# Altium PCB OK6010_DB.PcbDoc (part 2 of 4)
Units mil, origin at the board's own origin, x right, y up, seen from the top; angles counter-clockwise.
Board outline 4000 x 5500 mil, 4 copper layers (Top Layer, Ground Plane, Power Plane, Bottom Layer), stack 34.2 mil thick; 268 components, 248 nets, 1028 pads, 599 vias.
Unrouted connection lines stored in the file: 10.
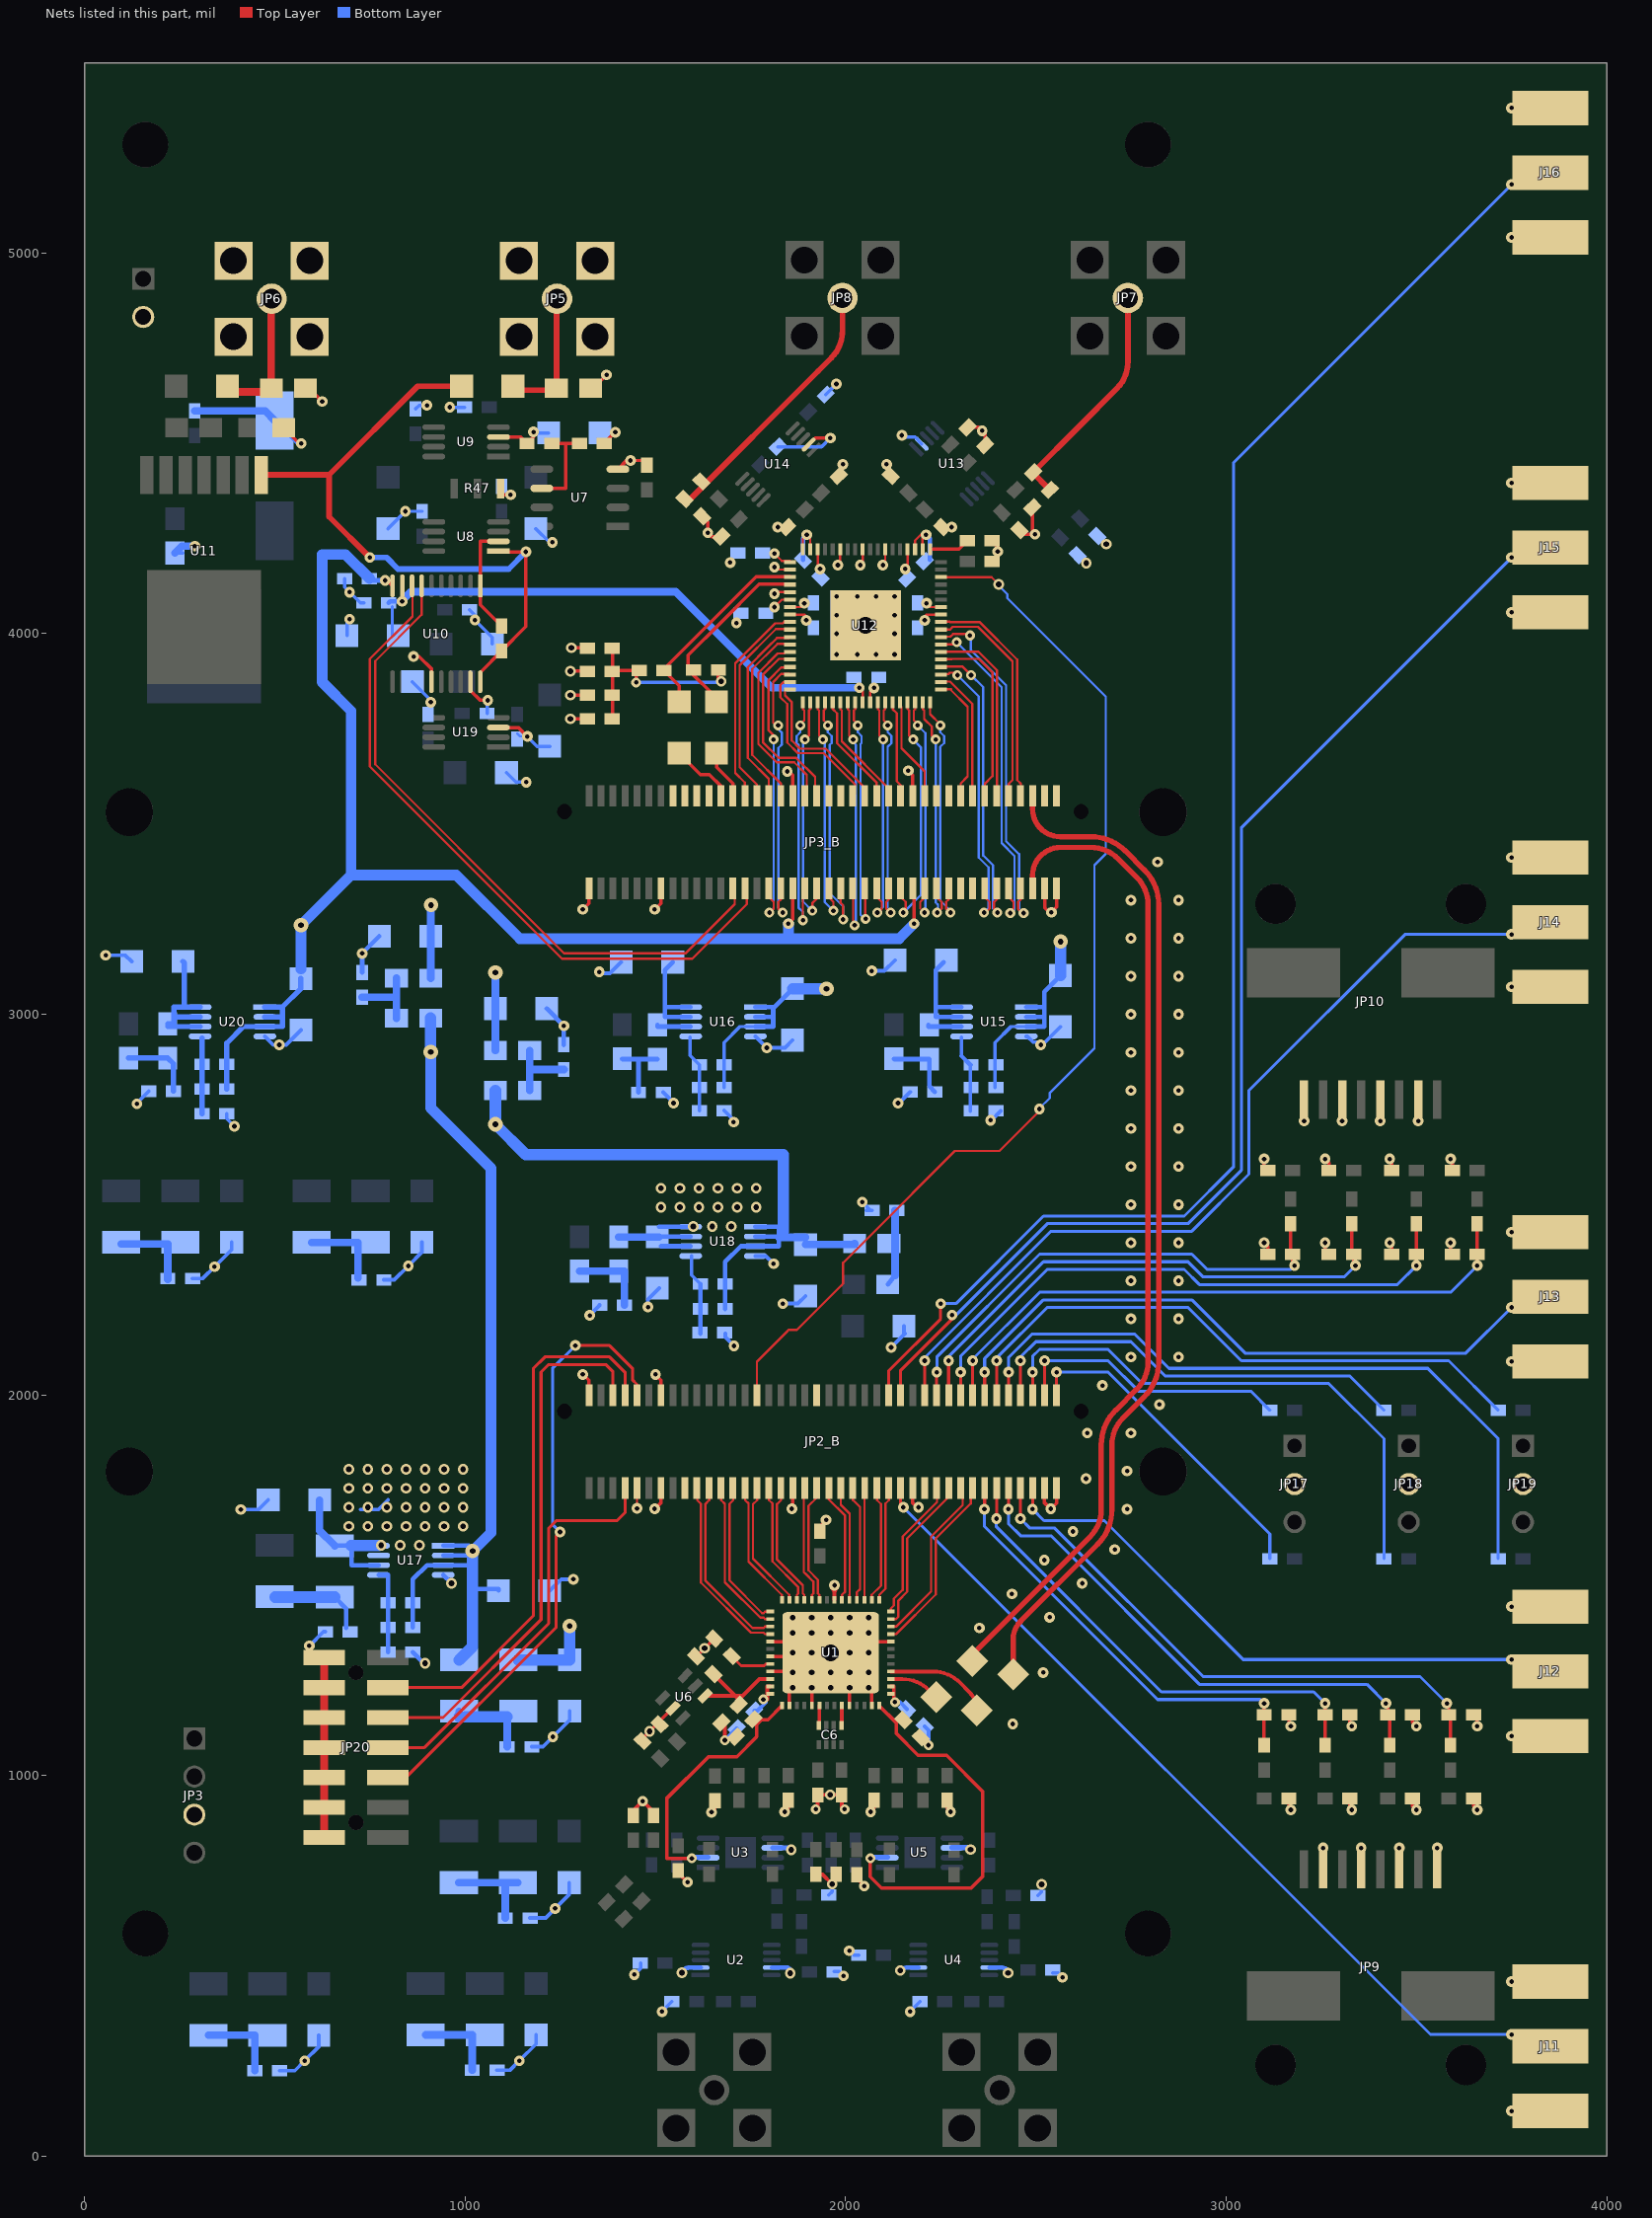
[diagram p4: the nets of this part, all layers, seen from the top]

## Via types
v1: diameter 28, hole 12, Top Layer to Bottom Layer, 291 vias
v2: diameter 28, hole 15, Top Layer to Bottom Layer, 214 vias
v3: diameter 26, hole 12, Top Layer to Bottom Layer, 64 vias
v4: diameter 38, hole 15, Top Layer to Bottom Layer, 26 vias
v5: diameter 35, hole 15, Top Layer to Bottom Layer, 2 vias
v6: diameter 26, hole 12, Top Layer to Bottom Layer, tented both sides, 1 vias
v7: diameter 58, hole 44, Top Layer to Bottom Layer, 1 vias

## Nets (pads, with @x,y where several pads share a name; then routed paths per layer and width w, separated by ;. In a path a pad name is that pad's centre, name@x,y a point inside that pad or via, vN(x,y) a via of type N, cw(c..) or ccw(c..) an arc to the next point about the centre after c; other vN are vias at no path point) (continued)
AGND: C1.1 C2.2 C3.2 C4.2 C8.2 C9.1 C10.2 C11.2 C12.2 C13.2 C14.2 C15.2 C16.1 C17.1 C18.1 C19.2 C20.2 C21.2 C22.2 C23.2 C24.1 C26.2 C27.2 C28.2 C29.1 C30.1 C31.2 C32.1 C33.2 C34.2 C35.2 C36.2 C39.2 C40.2 C41.1 C42.1 C43.2 C44.1 C45.1 C46.2 C47.2 C48.2 C49.2 C50.1 C51.2 C52.2 C53.2 C55.2 C56.2 C57.2 C58.2 C59.2 C60.2 C61.2 C63.1 C64.2 C65.2 C66.2 C68.2 C69.2 C70.2 C71.2 C73.2 C74.2 C75.2 C76.1 C77.2 C78.2 C79.1 C80.1 C81.2 C82.2 C83.2 C84.2 C85.2 C86.2 C87.2 C88.2 C89.2 C90.2 C91.2 C92.2 C93.2 C94.1 C95.2 C96.2 C97.2 C98.2 C99.2 C100.2 C101.2 C103.2 C104.1 C105.2 C106.1 C111.1 C112.1 C113.1 C114.1 C115.2 C116.2 C117.2 C118.2 C119.1 C120.1 C121.1 C122.1 C123.2 C124.2 C125.2 C126.2 C127.2 J11.2 J12.2 J13.2 J14.2 J15.2 J16.2 JP2_B.1 JP2_B.13 JP2_B.14 JP2_B.36 JP2_B.56 JP2_B.78 JP2_B.80 JP3.3 JP3_B.2 JP3_B.14 JP3_B.35 JP3_B.55 JP3_B.78 JP3_B.80 JP4.2 JP5.0 JP6.0 JP9.1 JP9.3 JP9.5 JP9.7 JP10.1 JP10.3 JP10.5 JP10.7 JP17.2 JP18.2 JP19.2 JP20.1 JP20.3 JP20.5 JP20.7 JP20.9 JP20.11 JP20.13 pad.0@2053,4021.81 R6.1 R9.1 R16.1 R19.1 R25.1 R28.1 R31.1 R32.2 R34.1 R35.1 R36.2 R38.1 R39.1 R40.1 R42.1 R44.1 R46.1 R47.1 R49.1 R54.1 R55.1 R56.1 R57.1 U1.0 U1.2 U1.5 U1.10 U1.13 U1.22 U1.33 U1.45 U1.47 U1.49 U2.2 U2.9 U3.6 U4.2 U4.9 U5.6 U6.2 U7.4 U10.15 U10.19 U12.2 U12.5 U12.7 U12.28 U12.48 U12.58 U12.61 U12.64 U12.67 U12.70 U13.2 U14.2 U15.4 U16.4 U17.4 U18.4 U19.3 U20.4 | length 9303.3
  Top Layer w6: v1(1813,4105) 1817.26,4109.26 U12.5@1854,4109.26 ; v1(1813,4175) 1819.68,4168.32 U12.2@1854,4168.32 ; U12.7@1854,4069.89 1891.62,4069.89 v1@1901.73,4080 ; U12.70@1926.91,4221.54 1926.91,4176.09 v1(1933,4170) ; C50.1@1933,1642 1933,1656 v1(1949,1672) ; v1@1979.88,4170 1985.97,4176.09 U12.67@1985.97,4221.54 ; v1@2038.94,4170 2045.02,4176.09 U12.64@2045.02,4221.54 ; U12.28@2064.71,3819.81 2064.71,3847.43 v1(2074.82,3857.54) ; v1@2104.08,4176.09 U12.61@2104.08,4221.54 ; v1@2163.13,4176.09 U12.58@2163.13,4221.54 ; v1@2203,4080 2213.11,4069.89 U12.48@2250.73,4069.89
  Top Layer w9: R25.1@524,4541 565,4500 v1(570,4500) ; C29.1@581,4645 590,4645 v1(625,4610) ; v1(865,3940) 880,3940 912.02,3907.98 U10.15@912.02,3873.72 ; U10.19@1014.39,3873.72 1014.39,3850.61 1040,3825 v1(1060,3825) ; U19.3@1088.05,3753.49 1140.51,3753.49 v1(1164,3730) ; R47.1@1093.58,4366.68 1093.58,4365 v1(1120,4365) ; v2(1277.34,3776.03) C35.2@1322.74,3776.03 ; v2(1277.34,3838.34) C36.2@1322.74,3838.34 ; v2(1277.34,3901.66) R28.1@1322.74,3901.66 ; v1@1314.5,2050 1326,2038.5 JP2_B.1@1326,1984 ; v1@1314.5,3280 1326,3291.5 JP3_B.2@1326,3346 ; C24.1@1330,4645 1337,4645 v1(1372,4680) ; C17.1@1366,4500.31 v1(1395,4529.31) ; U7.4@1402,4432 1425,4455 1466,4455 C16.1@1478,4443 ; C93.2@1466.77,1097.88 v2(1485,1116.11) 1507.62,1138.72 U6.2@1546.45,1177.55 ; v1@1503.5,1705 1515,1716.5 JP2_B.14@1515,1771 ; v1@1503.5,2050 1515,2038.5 JP2_B.13@1515,1984 ; v1@1503.5,3280 1515,3291.5 JP3_B.14@1515,3346 ; C46.2@1607.04,1312.96 1608.04,1312.96 v2(1630.08,1335) C12.2@1655.04,1359.96 C12.2@1654.04,1359.96 ; C43.2@1625.96,4305.04 1637.96,4293.04 v1(1637.96,4264.96) 1647.92,4255 R39.1@1674,4255 ; v1(1648,904) 1657,913 C2.2@1657,934 ; U1.49@1802.91,1273.26 U1.0@1839.66,1273.26 ; U1.47@1802.91,1312.63 U1.0@1838.66,1312.63 ; U1.45@1802.91,1352 U1.0@1849.82,1352 ; v1(1840,905) 1849,914 C1.1@1849,935 ; v1@1850,3640 1861.5,3628.5 JP3_B.35@1861.5,3574 ; 1852.43,1194.39 U1.0@1852.43,1220.15 ; v1@1861.5,1701 JP2_B.36@1861.5,1771 ; U14.2@1903.08,4496.92 1920.54,4514.38 1947.38,4514.38 v1@1953,4520 ; 1911.37,1194.27 U1.0@1911.37,1220.02 ; 2010.53,1194.27 U1.0@2010.53,1220.02 ; C90.2@2040,740 2040,719.2 v1(2049.27,709.93) ; v1(2066,905) 2075,914 C10.2@2075,935 ; 2068.97,1194.39 U1.0@2068.97,1220.15 ; U1.0@2084.99,1352.24 U1.22@2110.75,1352.24 ; v1(2165,3640) 2176.5,3628.5 JP3_B.55@2176.5,3574 ; JP2_B.56@2176.5,1771 2176.5,1716.5 v1@2188,1705 ; C9.1@2267,935 2267,914 v1(2276,905) ; C41.1@2321,4542 2350,4542 v1(2359,4533) 2367,4525 C42.1@2367,4495 ; C39.2@2385,4244 2400.04,4228.96 v1(2400.04,4215.96) ; R35.1@2457,4272 2468,4261 v1(2498,4261) 2491.04,4267.96 C40.2@2491.04,4320 ; C40.2@2491,4319.96 C40.2@2491.04,4320 ; C40.2@2491.04,4332.04 C40.2@2491.04,4320 ; JP2_B.78@2523,1771 2523,1716.5 v1@2534.5,1705 ; JP3_B.78@2523.5,3334 2523.5,3279.5 v1@2535,3268 ; v1(2539.5,1701) 2554.5,1716 JP2_B.80@2554.5,1756 ; v1(2541,3268) 2555,3282 JP3_B.80@2555,3334 ; v1(3100,2400) 3110,2390 C119.1@3110,2370 ; v1(3100,2620) 3100,2600 C120.1@3110,2590 ; C118.2@3165,940 3165,915 v1(3170,910) ; C117.2@3165,1160 3165,1135 v1(3170,1130) ; v1(3260,2400) 3260,2380 C121.1@3270,2370 ; v1(3260,2620) 3270,2610 C122.1@3270,2590 ; C116.2@3325,940 3325,915 v1(3330,910) ; C115.2@3325,1160 3325,1135 v1(3330,1130) ; v1(3430,2400) 3435,2395 C123.2@3435,2370 ; v1(3430,2620) 3435,2615 C124.2@3435,2590 ; C114.1@3490,940 3490,920 v1(3500,910) ; C113.1@3490,1160 3490,1140 v1(3500,1130) ; v1(3590,2400) 3590,2375 C125.2@3595,2370 ; v1(3590,2620) 3595,2615 C126.2@3595,2590 ; C112.1@3650,940 3650,920 v1(3660,910) ; C111.1@3650,1160 3660,1150 v1(3660,1130)
  Top Layer w10: R54.1@1442.9,895.51 1442.9,908.9 v1(1467,933) 1495.9,904.1 R55.1@1495.9,895.51 ; C87.2@1560.54,744.46 v1(1585,720) ; C106.1@1673.49,1139.9 1683,1130.39 v3(1683,1093) ; v3(1922,912) 1927,917 C4.2@1927,949 ; R56.1@1922.1,740.49 1939.51,740.49 v2(1965,715) ; C4.2@1927.83,949.74 v2(1959.74,949.74) C8.2@1990.83,949.74 ; v1@1964.64,1493.64 cw(c1949.77,1478.77) 1970.79,1478.77 ; U1.33@1970.8,1461.72 v1@1970.79,1499.8 ; 1970.79,1477.77 cw(c1993.23,1477.77) v1@1977.36,1493.64 ; C8.2@1990,949 1990,919.48 v3(1997.48,912)
  Top Layer w20: JP20.13@630,837.56 JP20.11@630,916.3 JP20.9@630,995.04 JP20.7@630,1073.78 JP20.5@630,1152.52 JP20.3@630,1231.26 JP20.1@630,1310
  Bottom Layer w6: C33.2@1137,3738 1145,3730 v1(1164,3730)
  Bottom Layer w9: C27.2@238,4212 C27.2@258,4212 ; C26.2@500,4560 560,4500 v1(570,4500) ; C103.2@684,4145 684,4122 v1(697,4109) 725,4081 C22.2@734,4081 ; C21.2@690,3995 690,4031 v1(697,4038) ; C13.2@798,4276 v1(843.49,4321.49) C96.2@886.9,4321.49 ; C30.1@862,3874 910,3826 v1(910,3820) ; C14.2@870,4590 880,4600 v1(900,4600) ; v1(960,4595) C19.2@999,4595 ; C23.2@1012,4063 1026,4049 v1(1026,4036) 1072,3990 C20.2@1072,3973 ; C28.2@1058,3790 1058,3823 v1(1060,3825) ; C31.2@1109,3635 1134,3610 v1(1161,3610) ; v1(1164,3730) 1190,3704 C32.1@1223,3704 ; C18.1@1186,4276 1222,4240 v1(1230,4240) ; v1@1450.07,482.27 1461.8,494 C88.2@1461.8,507.34 ; v1(1518,380) R9.1@1544,406 ; C45.1@1822,4491 1937,4491 v1(1960,4514) ; C44.1@1948,4628 v1(1976,4656) ; R6.1@1956,686 1965,695 v2(1965,715) ; C89.2@1969.86,485.46 1983.2,485.46 v1(1994.93,473.73) ; v1(2010,540) 2021.73,528.27 C91.2@2035.07,528.27 ; v1@2150,4522 2155.62,4516.38 2182.46,4516.38 U13.2@2199.92,4498.92 ; v1(2170,380) R19.1@2196,406 ; R16.1@2506,685 2515,694 v2(2515,714) ; C92.2@2544.93,481.73 2558.27,481.73 v1(2570,470)
  Bottom Layer w10: v1(56,3155) 108,3155 C100.2@124,3139 ; v1(138,2765) 138,2767 C99.2@169,2798 ; C95.2@284,2306.1 311.1,2306.1 v1(342,2337) 387,2382 C98.2@387,2401.1 ; R49.1@374,2739 374,2726 v1(394,2706) ; v1(411,1699) 458,1699 C49.2@483,1724 ; U20.4@474,2942.2 497,2919.2 511.2,2919.2 v1(512,2920) 530,2920 C101.2@569,2959 ; C60.2@513,225 553,225 v1(579,251) 616,288 C61.2@616,318 ; v1(591,1341) 628,1378 C48.2@633,1378 ; C105.2@787,2302.49 814.49,2302.49 v1(851,2339) 887,2375 C104.1@887,2401.1 ; C64.2@1084,226 1118,226 v1(1143,251) 1187,295 C63.1@1187,319 ; C58.2@1171,626 1212,626 v1(1237,651) 1274,688 C59.2@1274,719 ; C68.2@1176,1076 1205,1076 v1(1231,1102) 1275,1146 C69.2@1275,1169 ; C47.2@1223,1486 1253,1516 v1(1285,1516) ; v1(1328,2209) 1354,2235 C73.2@1354,2236.2 ; v1(1353,3111.4) 1357,3107.4 1381.2,3107.4 C56.2@1411,3137.2 ; v1(1481,2231) 1481,2251.2 C74.2@1510,2280.2 ; C55.2@1521,2795.2 1548,2768.2 v1(1548,2767) ; R42.1@1681,2747.2 1706,2722.2 v1(1706,2717) ; R46.1@1684,2161.2 1684,2152 v1(1707,2129) ; v3@1688,1098.8 C85.2@1713.97,1124.77 ; U18.4@1763,2365.2 1790.8,2365.2 v1(1811,2345) ; U16.4@1763,2942.2 v1(1793.2,2912) 1840.8,2912 C57.2@1861,2932.2 ; v1(1835,2240) 1874.8,2240 C75.2@1895,2260.2 ; v1(2044,2507) C83.2@2066,2485 ; C83.2@2055,2485 C83.2@2069,2485 ; v1(2069,3114) 2101.8,3114 C52.2@2130,3142.2 ; v1(2120,2125) C84.2@2156,2161 ; v1(2138,2767) 2140.8,2767 C51.2@2170,2796.2 ; C84.2@2154,2161 C84.2@2154,2181 ; C86.2@2207.69,1129.11 2218,1118.8 v3(2218,1080) ; v1(2381,2721.8) 2383.8,2721.8 R40.1@2408,2746 ; U15.4@2475,2942.2 2477.8,2942.2 2493,2927 2524.8,2927 C53.2@2565,2967.2
  Bottom Layer w12: C65.2@730,3110 v1(730,3160) C66.2@775,3205 ; R44.1@863,1324 892,1295 v2(895,1295) ; U17.4@943,1527.2 v2(964.57,1505.63) ; C71.2@1215,3015 v1(1260,2970) C70.2@1260,2920 ; v2@1571.19,487.56 cw(c1590.89,467.86) 1590.89,495.72 U2.2@1619.33,495.72 ; U2.9@1806.34,496 1842.02,496 cw(c1842.02,478.38) v2@1854.48,490.84 ; v2(2143.79,487.84) cw(c2163.49,468.14) 2163.49,496 U4.2@2191.93,496 ; U4.9@2378.93,496 2407.38,496 cw(c2407.38,468.14) v2@2427.08,487.84
  Bottom Layer w14: U3.6@1809,810.2 1844.68,810.2 cw(c1844.68,792.58) v2(1857.14,805.04) ; U5.6@2280.38,811.16 2316.07,811.16 cw(c2316.07,793.54) v2(2328.52,806)
  Bottom Layer w20: C27.2@238,4212 256,4230 v1(290,4230) ; C127.2@290,4585 475,4585 C26.2@500,4560
  other v1: 3750,119 3750,459 1445.07,477.27 3255,810 3355,810 3455,810 3555,810 3750,1104 2439.45,1135.87 2519.45,1270.87 2351.6,1388.02 2536.4,1416.07 3750,1444 2437.16,1477.16 1971,1500 2621.96,1505.2 2522.71,1566.29 2707.51,1594.33 2597.71,1641.29 2740,1700 1498.5,1701 1859,1701 2192,1705 2632,1780 2740,1800 2635,1900 2750,1900 2825,1975 2675,2025 1309.5,2054 1500.5,2054 3750,2088 2750,2100 2875,2100 2750,2200 2875,2200 2750,2300 2875,2300 2750,2400 2875,2400 3750,2428 2750,2500 2875,2500 2750,2600 2875,2600 2750,2700 2875,2700 3205,2720 3305,2720 3405,2720 3505,2720 2750,2800 2875,2800 2750,2900 2875,2900 2513,2920 2750,3000 2875,3000 3750,3072 2750,3100 2875,3100 2750,3200 2875,3200 1309.5,3276 1498.5,3276 2750,3300 2875,3300 2820,3400 3750,3412 1847,3638 1977,3945.62 2031,3945.62 2080,3945.62 2129,3945.62 1977,4000 2129,4000 1713.49,4028.1 1977,4049 2129,4049 3750,4056 1891.73,4080 2213,4080 1977,4098 2031,4098 2080,4098 2129,4098 2157.05,4170 1979.88,4180 2038.94,4180 2097.99,4180 1697,4187 1822,4280.08 2279,4280 3750,4396 1993,4445 2108,4445 1435,4455 2148,4521 3750,5041 3750,5381
  other v2: 1854.48,480.84 2427.07,481.84 1570.19,482.56 1861,1231 1911,1231 1961,1231 2011,1231 2061,1231 1861,1271 1911,1271 1961,1271 2011,1271 2061,1271 1861,1323 1911,1323 2011,1323 2061,1323 1861,1375 1911,1375 1961,1375 2011,1375 2061,1375 1861,1415 1911,1415 1961,1415 2011,1415 2061,1415
  other v7: 2053,4021.81
AV18: C47.1 C67.1 L13.1 L15.1 R43.2 U17.1 U17.2 U17.3 | length 2291
  Bottom Layer w12: R43.2@863,1389 C67.1@863,1454 863,1515.8 900,1552.8 U17.3@943,1552.8 1020,1552.8 ; U17.2@943,1578.4 v4@1010,1578.4 ; U17.1@943,1604 v4@1010,1604 ; 1020,1490 1088,1490 C47.1@1088,1486
  Bottom Layer w28: v4(910,2901) 910,2754 1068,2596 1068,1638 v4(1020,1590)
  Bottom Layer w30: v4(910,2901) L13.1@910,2990 ; L15.1@985,1304 1020,1339 1020,1490 1020,1552.8 v4(1020,1590)
AVDD18: C69.1 C85.1 C86.1 L16.2 U1.15 U1.16 U1.51 U1.52 | length 385.7
  Top Layer w10: v3@1794,1201 1794,1234.01 U1.51@1802.04,1234.01 ; U1.16@2119.13,1234.01 2127.16,1234.01 v6@2127.16,1201
  Bottom Layer w10: C85.1@1759.93,1170.73 1768.9,1170.73 v3@1791.16,1193 ; v6(2130,1193) 2143.8,1193 C86.1@2161.73,1175.07
  Bottom Layer w30: L16.2@1140,1304 C69.1@1275,1304 v4(1275,1393)
  other v3: 1784.16,1200
AVDD33: C53.1 C54.1 C76.2 C78.1 R22.2 U12.56 U12.57 U12.71 U12.72 U15.1 U15.2 U15.3 | length 926.2
  Top Layer w6: U12.72@1887.54,4221.54 1887.54,4249.54 v1(1898,4260) 1907.23,4250.77 U12.71@1907.23,4221.54 ; U12.57@2182.82,4221.54 2182.82,4244.82 2198,4260 v1(2211.73,4260) 2202.5,4250.77 U12.56@2202.5,4221.54
  Bottom Layer w9: R22.2@2393,2807.2 2393,2926 2434.8,2967.8 U15.3@2475,2967.8
  Bottom Layer w12: C78.1@1888.51,4193.9 1888.51,4250.51 v1(1898,4260) ; v1(2211.73,4260) 2221.22,4250.51 C76.2@2221.22,4193.9 ; U15.3@2475,2967.8 2522,2967.8 2522,2993.4 ; U15.2@2475,2993.4 2522,2993.4 ; U15.1@2475,3019 2522,3019 ; C53.1@2565,3102.2 2522,3059.2 2522,3019 ; 2522,2993.4 2522,3019
  Bottom Layer w30: C53.1@2565,3102.2 v4(2565,3191.2)
"BANK 1 VREF": JP2_B.10 | length 54
  Top Layer w6: v1(1452,1702) JP2_B.10@1452,1756
C\L\R\: JP3_B.26 U10.7 | length 1794.4
  Top Layer w6: U10.7@886.43,4125.69 886.43,4050.23 764,3927.8 764,3657.01 1199.5,3221.5 ; 1220,3201 1199.5,3221.5 ; JP3_B.26@1709,3331 1709,3289.5 1579.5,3160 1261,3160 1199.5,3221.5
CSB: JP2_B.29 U12.52 | length 2868.4
  Top Layer w6: JP2_B.29@1767,1999 1767,2087.8 1846.1,2166.9 1850.2,2171 1872.2,2171 1981.1,2279.9 1985.2,2284 1989.3,2288.1 1993.4,2292.2 1993.4,2347.01 2062.7,2416.3 2287.4,2641 2404.6,2641 2509.5,2745.9 v1(2509.5,2751.3) ; U12.52@2250.73,4148.63 2383.77,4148.63 v2(2402.7,4129.7)
  Bottom Layer w6: v2(2402.7,4129.7) 2402.7,4126.2 2425.25,4103.65 2425.25,4093.15 2684,3834.4 2684,3421.8 2654,3391.8 2654,2911 2537,2794 2537,2780.5 2509.5,2753 v1(2509.5,2751.3)
CVDD18: C66.1 C81.1 C82.1 L14.2 R27.2 U12.1 U12.6 | length 336.6
  Top Layer w6: v1(1813,4070) 1832.57,4089.58 U12.6@1854,4089.58 ; v1(1813,4210.58) 1832.57,4191 U12.1@1854,4191
  Top Layer w9: v2(1279.49,3962.97) R27.2@1322.74,3962.97
  Bottom Layer w9: v2@1277,3964 ccw(c1279.49,3966.49) v2(1279.49,3962.97)
  Bottom Layer w20: L14.2@910,3095 C66.1@910,3205 910,3286 v4(911,3287)
DV18: C72.1 C75.1 L17.1 L21.1 R45.2 U18.1 U18.2 U18.3 | length 1738.8
  Bottom Layer w12: R45.2@1684,2226.2 C72.1@1684,2291.2 1684,2350 1724.8,2390.8 U18.3@1763,2390.8 1825,2390.8 1825,2414.2 1825,2416.4 ; U18.2@1763,2416.4 1825,2416.4 ; U18.1@1763,2442 1825,2442 1825,2416.4
  Bottom Layer w20: 1825,2414.2 C75.1@1895,2414.2 ; C75.1@1895,2395.2 2024,2395.2 L21.1@2024,2398
  Bottom Layer w30: L17.1@1080,2800 v4(1080,2711) 1160,2631 1837,2631 1837,2430
DVDD18: C71.1 C79.2 C80.2 L18.2 U12.8 U12.47 | length 308.8
  Top Layer w6: U12.8@1854,4050.21 1891.62,4050.21 v1@1901.73,4040.1 ; v1@2203,4040.1 2213.11,4050.21 U12.47@2250.73,4050.21
  Bottom Layer w20: L18.2@1080,2905 C71.1@1080,3015 v4(1080,3110)
  other v1: 1896.73,4035.1 2208,4035.1
DVDD25: C101.1 C102.1 C103.1 JP3_B.36 JP3_B.56 R48.2 U10.10 U20.1 U20.2 U20.3 | length 3704.1
  Top Layer w9: v1(790,4140) 795.35,4140 U10.10@809.66,4125.69 ; v1(1850,3238) 1861.5,3249.5 JP3_B.36@1861.5,3331 ; JP3_B.56@2176.5,3331 2180,3327.5 v1@2180,3240
  Bottom Layer w12: C103.1@749,4145 754,4140 v1(790,4140)
  Bottom Layer w14: R48.2@374,2804 C102.1@374,2869 374,2924 417.8,2967.8 U20.3@474,2967.8 520,2967.8 520,2993.4 ; U20.2@474,2993.4 520,2993.4 ; U20.1@474,3019 520,3019 ; C101.1@569,3094 569,3068 520,3019 ; 520,2993.4 520,3019
  Bottom Layer w28: C101.1@569,3119 v4(569,3234) 701,3366 ; C103.1@749,4145 686,4208 625,4208 625,3873 701,3797 701,3366 ; 1850,3205 v1(1850,3238) ; v1(2180,3238) 2141,3199 1144,3199 977,3366 701,3366
DVDD33: C21.1 C22.1 C57.1 C62.1 C77.1 R41.2 R50.2 R51.2 U10.9 U12.27 U16.1 U16.2 U16.3 | length 2085.4
  Top Layer w6: v1(2036,3858) 2045.02,3848.98 U12.27@2045.02,3819.81
  Top Layer w9: v1(835,4085) 835.25,4085.25 U10.9@835.25,4125.69
  Bottom Layer w9: C21.1@809,3994 C22.1@809,4071 ; R41.2@1681,2807.2 C62.1@1681,2867.2 1681,2926 1722.8,2967.8 U16.3@1763,2967.8 ; 1810,3019 1812.8,3019
  Bottom Layer w12: C22.1@799,4081 803,4085 833,4085 v1(835,4085) ; U16.3@1763,2967.8 1810,2967.8 1810,2993.4 ; U16.2@1763,2993.4 1810,2993.4 ; U16.1@1763,3019 1810,3019 1810,2993.4 ; 1812.8,3019 C57.1@1861,3067.2
  Bottom Layer w20: v1@833,4085 858,4110 1554,4110 1806,3858 v1(2036,3858)
  Bottom Layer w30: C57.1@1861,3067.2 v4(1950,3067.2)
  other v2: 2632.8,4184.98 2685,4235
JTAG_TCK: JP2_B.5 JP20.6 | length 1426.5
  Top Layer w8: JP20.6@797.32,1152.52 942.52,1152.52 1200,1410 1200,2060 1220,2080 1370,2080 1389,2061 JP2_B.5@1389,1999
JTAG_TDI: JP2_B.9 JP20.10 | length 1634.4
  Top Layer w8: JP20.10@797.32,995.04 845.04,995.04 1240,1390 1240,1630 v1(1250,1640) ; v1(1290,2130) 1380,2130 1440,2070 1440,2040 1452,2028 JP2_B.9@1452,1999
  Bottom Layer w8: v1(1250,1640) 1230,1660 1230,2070 v1(1290,2130)
JTAG_TDO: JP2_B.8 JP20.8 | length 1090.6
  Top Layer w8: JP20.8@797.32,1073.78 893.78,1073.78 1220,1400 1220,1650 1240,1670 1400,1670 1420.5,1690.5 JP2_B.8@1420.5,1756
JTAG_TMS: JP2_B.7 JP20.4 | length 1441.1
  Top Layer w6: JP2_B.7@1420.5,1999 JP2_B.7@1420.5,2024.5
  Top Layer w8: JP20.4@797.32,1231.26 991.26,1231.26 1180,1420 1180,2070 1210,2100 1380,2100 1420.5,2059.5 JP2_B.7@1420.5,2024.5
L1_0_N: JP3_B.51 U12.24 | length 299.4
  Top Layer w6: U12.24@1986.3,3820.69 1986.3,3801.9 1990,3798.2 1990,3716.97 2113.5,3593.47 JP3_B.51@2113.5,3574
L1_0_P: JP3_B.49 U12.23 | length 294.5
  Top Layer w6: U12.23@1966.61,3820.69 1966.61,3801.9 1978,3790.51 1978,3712 2082,3608 JP3_B.49@2082,3574
L2_0_N: C38.1 JP3_B.25 | length 129.8
  Top Layer w9: C38.1@1661,3686 1661,3648.9 1704,3605.9 JP3_B.25@1704,3574
L2_0_P: C37.1 JP3_B.23 | length 170.8
  Top Layer w9: C37.1@1563,3686 1619,3630 1642,3630 1672.5,3599.5 JP3_B.23@1672.5,3574
L3_0_N: JP3_B.47 U12.18 | length 415
  Top Layer w6: U12.18@1841,3853.36 1841,3837.97 1859,3819.97 1859,3719 1880,3698 1947.97,3698 2050.5,3595.47 JP3_B.47@2050.5,3574 ; U12.18@1845,3853.36 U12.18@1854,3853.36
L3_0_P: JP3_B.45 U12.17 | length 434.3
  Top Layer w6: U12.17@1854,3873.04 1837.04,3873.04 1829,3865 1829,3833 1847,3815 1847,3714.03 1875.03,3686 1943,3686 2025,3604 JP3_B.45@2025,3580
L4_0_N: JP3_B.52 U12.30 | length 641.4
  Top Layer w6: U12.30@2104.41,3820.69 2104.41,3801.9 2100.57,3798.06 2100.57,3772.28 v3@2110.85,3762 ; 2107,3276.5 2107,3277.5 ; JP3_B.52@2114.27,3331.15 2114.27,3302.27 2107,3295 2107,3277.5 ; v3@2118.5,3266 2107,3277.5
  Bottom Layer w6: v3(2110.85,3759) 2110.85,3741.11 2120.85,3731.11 2120.85,3712.89 2110.85,3702.89 2110.85,3275.15 v3(2118.5,3267.5)
L4_0_P: JP3_B.50 U12.29 | length 640.4
  Top Layer w6: JP3_B.50@2082.77,3331.15 2082.77,3307.23 2095,3295 2095,3277.5 v3@2083.5,3266 ; U12.29@2084.72,3820.69 2084.72,3801.9 2088.57,3798.06 2088.57,3732.28 v3(2098.85,3722)
  Bottom Layer w6: v3(2083.5,3267.5) 2098.85,3282.85 v3(2098.85,3722)
L5_0_N: JP3_B.58 U12.34 | length 624.2
  Top Layer w6: U12.34@2183.15,3820.69 2183.15,3819.81 2183.15,3801.9 2179.31,3798.06 2179.31,3772.28 v3@2189.59,3762 ; 2196.54,3277.5 2196.54,3295 2208.77,3307.23 2208.77,3331 JP3_B.58@2208.77,3331.15
  Bottom Layer w6: v3(2189.59,3759) 2210,3738.59 2210,3269.96 v3(2207.54,3267.5)
L5_0_P: JP3_B.54 U12.33 | length 645.3
  Top Layer w6: JP3_B.54@2145.77,3331.15 2145.77,3307.23 2158,3295 v3@2158,3277.5 ; U12.33@2163.46,3820.69 2163.46,3801.9 2167.31,3798.06 2167.31,3732.28 v3(2177.59,3722)
  Bottom Layer w6: v3(2152,3267.5) 2198,3313.5 2198,3701.59 v3(2177.59,3722)
L6_0_N: JP3_B.57 U12.32 | length 233.3
  Top Layer w6: U12.32@2147,3808 2147,3699 2208,3638 JP3_B.57@2208,3600
L6_0_P: JP3_B.53 U12.31 | length 216.7
  Top Layer w6: U12.31@2124.09,3808 2124.09,3801.9 2135,3790.99 2135,3612 2145,3602 JP3_B.53@2145,3600
L7_0_N: JP3_B.34 U12.16 | length 762.8
  Top Layer w6: v3(1823,3759) 1817,3759 1810,3766 1810,3872.95 1831.05,3894 1852.73,3894 U12.16@1854,3892.73 ; 1823.5,3276.5 1823.5,3277.5 ; JP3_B.34@1830.77,3331.15 1830.77,3302.27 1823.5,3295 1823.5,3277.5 ; v3@1835,3266 1823.5,3277.5
  Bottom Layer w6: v3@1824.5,3760.5 1823,3762 v3(1823,3759) 1823,3749 1833,3739 1833,3709.5 1823.5,3700 1823.5,3279 v3(1835,3267.5) ; v3@1833,3267.5 1833,3267 v3@1835,3265
L7_0_P: JP3_B.32 U12.15 | length 764.1
  Top Layer w6: JP3_B.32@1799.27,3331.15 1799.27,3307.23 1811.5,3295 1811.5,3277.5 v3@1800,3266 ; v3(1811,3722) 1811,3733 1798,3746 1798,3877.92 1831.08,3911 U12.15@1852.59,3911
  Bottom Layer w6: v3(1800,3267.5) 1811.5,3279 1811.5,3721.5 v3(1811,3722)
L8_0_N: JP3_B.62 U12.36 | length 650.1
  Top Layer w6: U12.36@2222.52,3820.69 2222.52,3788.44 v3@2248.96,3762 ; 2264.5,3276.5 2264.5,3277.5 ; JP3_B.62@2271.77,3331.15 2271.77,3302.27 2264.5,3295 2264.5,3277.5 ; v3@2276,3266 2264.5,3277.5
  Bottom Layer w6: v3(2248.96,3759) 2248.96,3741.11 2258.96,3731.11 2258.96,3712.89 2248.96,3702.89 2248.96,3299.01 v3@2276,3271.97
  other v3: 2276,3267.5
L8_0_P: JP3_B.60 U12.35 | length 645.6
  Top Layer w6: U12.35@2202.83,3820.69 2202.83,3801.9 2206.68,3798.06 2206.68,3775.85 2226.68,3755.85 2226.68,3732.28 v3(2236.96,3722) ; JP3_B.60@2240.27,3331.15 2240.27,3307.23 2252.5,3295 2252.5,3277.5 v3@2241,3266
  Bottom Layer w6: v3(2236.96,3722) 2236.96,3294.04 2243,3288 2243,3269.5 v3(2241,3267.5)
L19_1_N: JP2_B.73 R60.2 | length 1147.5
  Top Layer w6: v1(2459.5,2090) v1@2460,2089.5
  Top Layer w8: JP2_B.73@2460,1999 v1@2460,2089.5
  Bottom Layer w8: v1(2459.5,2090) 2459.5,2099.5 2500,2140 2750,2140 2840,2050 3325,2050 R60.2@3415,1960
L19_1_P: JP2_B.71 R71.2 | length 1840.4
  Top Layer w8: JP2_B.71@2428.5,1999 2428.5,2059.87 v1(2428.63,2060)
  Bottom Layer w8: v1(2428.63,2060) 2428.63,2098.63 2490,2160 2760,2160 2850,2070 3530,2070 3715,1885 R71.2@3715,1570
L20_1_N: JP2_B.75 R61.2 | length 1446
  Top Layer w8: JP2_B.75@2491.5,1999 v1(2491.5,2060)
  Bottom Layer w8: v1(2491.5,2060) 2491.5,2101.5 2510,2120 2690,2120 2780,2030 3270,2030 3415,1885 R61.2@3415,1570
L20_1_P: J12.1 JP2_B.76 | length 1593
  Top Layer w8: v1(2491.5,1700) JP2_B.76@2491.5,1756 ; v1(3750,1305) 3821,1305 J12.1@3852,1274
  Bottom Layer w8: v1(2491.5,1700) 2521.5,1670 2680,1670 3045,1305 v1(3750,1305)
L29_1_N: JP2_B.26 U1.41 | length 391.6
  Top Layer w6: JP2_B.26@1704.72,1756.31 1704.72,1723.9 1695,1714.17 1695,1513.02 1781,1427.02 1784.65,1427.02 1788.49,1430.86 U1.41@1802.04,1430.86
L29_1_P: JP2_B.24 U1.42 | length 411.5
  Top Layer w6: JP2_B.24@1673.22,1756.31 1673.22,1723.9 1683,1714.12 1683,1508.05 1776.03,1415.02 1784.65,1415.02 1788.49,1411.17 U1.42@1802.04,1411.17
L30_1_N: JP2_B.30 U1.39 | length 338.8
  Top Layer w6: JP2_B.30@1767.72,1756.31 1767.72,1723.9 1757,1713.17 1757,1686.03 1757,1570.21 1852.31,1474.9 U1.39@1852.31,1461.45
L30_1_P: JP2_B.28 U1.40 | length 334.8
  Top Layer w6: JP2_B.28@1736.22,1756.31 1736.22,1723.9 1745,1715.12 1745,1691 1745,1562.53 1832.63,1474.9 U1.40@1832.63,1461.45
L31_1_N: JP2_B.69 R70.2 | length 1582.9
  Top Layer w8: JP2_B.69@2397,1999 v1(2397,2090)
  Bottom Layer w8: v1(2397,2090) 2397,2097 2530,2230 2900,2230 3040,2090 3585,2090 R70.2@3715,1960
L31_1_P: J13.1 JP2_B.67 | length 1652.7
  Top Layer w8: JP2_B.67@2365.5,1999 v1(2365.5,2060)
  Bottom Layer w8: v1(2365.5,2060) 2365.5,2095.5 2520,2250 2910,2250 3050,2110 3630,2110 v1(3750,2230)
L32_0_N: JP3_B.39 U12.14 | length 486.4
  Top Layer w6: U12.14@1854,3932.1 1852.1,3934 1824.97,3934 1783,3892.03 1783,3715 1824,3674 1869.97,3674 1920,3623.97 JP3_B.39@1920,3578.5
L32_0_P: JP3_B.37 U12.13 | length 510.3
  Top Layer w6: U12.13@1854,3951.78 1843,3951.78 1839.22,3948 1822,3948 1771,3897 1771,3710.03 1819.03,3662 1865,3662 1898,3629 1898,3579 JP3_B.37@1893,3574
L32_1_N: C111.2 JP2_B.74 R62.1 | length 1491
  Top Layer w8: v1@2460,1675.5 JP2_B.74@2460,1731
  Top Layer w9: v1(3580,1190) 3585,1185 C111.2@3585,1160 3590,1155 R62.1@3590,1080
  Bottom Layer w8: v1(2459.5,1675) 2484.5,1650 2550,1650 2940,1260 3510,1260 v1(3580,1190)
L32_1_P: C113.2 JP2_B.72 R63.1 | length 1395.2
  Top Layer w8: v1@2428.5,1700.5 JP2_B.72@2428.5,1756
  Top Layer w9: v1(3420,1190) 3425,1185 C113.2@3425,1160 3430,1155 R63.1@3430,1080
  Bottom Layer w8: v1(2428,1700) 2428,1662 2460,1630 2540,1630 2930,1240 3370,1240 v1(3420,1190)
L33_0_N: JP3_B.40 U12.20 | length 632
  Top Layer w6: v3(1893.43,3722) 1903.72,3732.28 1903.72,3798.06 1907.56,3801.9 U12.20@1907.56,3820.69 ; v3(1912.73,3272.02) 1912.73,3291.73 1924.5,3303.5 JP3_B.40@1924.5,3331
  Bottom Layer w6: v3(1893.43,3722) v3@1893.43,3715.54 ; v3@1894.49,3714.49 v3@1893.43,3715.54 ; v3(1912.73,3272.02) 1888.43,3296.31 1888.43,3710.54 v3@1893.43,3715.54
L33_0_P: JP3_B.38 U12.19 | length 689.9
  Top Layer w6: v3@1881.43,3762 1891.72,3772.28 1891.72,3798.06 1887.87,3801.9 U12.19@1887.87,3820.69 ; v3(1887.98,3247.27) JP3_B.38@1887.98,3325.98 ; JP3_B.38@1893.77,3307.23 JP3_B.38@1893.77,3331.15
  Bottom Layer w6: v3(1881.43,3759) 1881.43,3741.11 1871.43,3731.11 1871.43,3712.89 1876.43,3707.89 1876.43,3280.57 1887.98,3269.02 v3(1887.98,3247.27)
L33_1_N: JP2_B.18
L34N_GCLK18_0_N: JP3_B.61
L34P_GCLK19_0_P: JP3_B.59
L35_1_N: C115.1 JP2_B.70 R64.1 | length 1242.5
  Top Layer w8: v1@2397,1675.5 JP2_B.70@2397,1731
  Top Layer w9: R64.1@3260,1080 C115.1@3260,1160 v1(3260,1190)
  Bottom Layer w8: v1(2396.5,1675) 2396.5,1653.5 2830,1220 3230,1220 v1(3260,1190)
L35_1_P: C117.1 JP2_B.68 R65.1 | length 1138.8
  Top Layer w8: v1(2365,1700) 2365.5,1700.5 JP2_B.68@2365.5,1756
  Top Layer w9: R65.1@3100,1080 C117.1@3100,1160 v1(3100,1190)
  Bottom Layer w8: v1(2365,1700) 2365,1655 2820,1200 3090,1200 v1(3100,1190)
L35N_GCLK16_0_N: JP3_B.79
L35P_GCLK17_0_P: JP3_B.77
L36_0_N: JP3_B.44 U12.22 | length 683.7
  Top Layer w6: U12.22@1946.93,3820.69 1946.93,3801.9 1943.09,3798.06 1943.09,3772.28 v3@1953.37,3762 ; JP3_B.44@1987.5,3331 1987,3330.5 1987,3293 1993.52,3286.48 v3@1993.52,3247.27
  Bottom Layer w6: v3(1953.37,3759) 1953.37,3741.11 1963.37,3731.11 1963.37,3712.89 1958.37,3707.89 1958.37,3318.63 1993.52,3283.48 v3@1993.52,3247.27
  other v3: 1993.52,3249.27
L36_0_P: JP3_B.42 U12.21 | length 631.5
  Top Layer w6: U12.21@1926.47,3820.67 1926.47,3801.88 1930.32,3798.04 1930.32,3732.26 v3(1940.6,3721.98) ; JP3_B.42@1956,3307.21 1968,3295.21 v3(1968,3272) ; JP3_B.42@1956.77,3307.23 JP3_B.42@1956.77,3331.15
  Bottom Layer w6: v3@1939.55,3714.46 v3@1940.6,3715.51 ; v3(1940.6,3721.98) v3@1940.6,3715.51 ; v3(1968,3272) 1945.6,3294.4 1945.6,3710.51 v3@1940.6,3715.51
L37_0_N: JP3_B.66
L37_0_P: JP3_B.64
L37_1_N: C125.1 JP2_B.65 R69.1 | length 1632.9
  Top Layer w8: JP2_B.65@2334,1999 v1(2334,2090)
  Top Layer w9: v1(3660,2340) C125.1@3660,2370 R69.1@3660,2450
  Bottom Layer w8: v1(2334,2090) 2334,2094 2510,2270 3590,2270 v1(3660,2340)
L37_1_P: C123.1 JP2_B.63 R68.1 | length 1542.5
  Top Layer w8: JP2_B.63@2302.5,1999 v1(2302.5,2060)
  Top Layer w9: v1(3500,2340) C123.1@3500,2370 R68.1@3500,2450
  Bottom Layer w8: v1(2302.5,2060) 2302.5,2102.5 2530,2330 2890,2330 2930,2290 3450,2290 v1(3500,2340)
L38_0_N: JP3_B.65 U12.38 | length 346.9
  Top Layer w6: U12.38@2251.06,3873.92 2275.06,3873.92 2333,3815.97 JP3_B.65@2333,3575
L38_0_P: JP3_B.63 U12.37 | length 333.6
  Top Layer w6: U12.37@2251.06,3854.23 2275.06,3854.23 ; 2277.77,3854.23 2275.06,3854.23 ; JP3_B.63@2302.5,3574 2302.5,3606.5 2321,3625 2321,3808.29 2275.06,3854.23
L38_1_N: JP2_B.22 U1.43 | length 471.5
  Top Layer w6: JP2_B.22@1641.72,1756.31 1641.72,1723.9 1631.97,1714.15 1631.97,1512.03 1756.35,1387.65 1784.65,1387.65 1788.49,1391.49 U1.43@1802.04,1391.49
L38_1_P: JP2_B.20 U1.44 | length 491.4
  Top Layer w6: JP2_B.20@1610.22,1756.31 1610.22,1723.9 1619.97,1714.15 1619.97,1507.06 1751.38,1375.65 1784.65,1375.65 1788.49,1371.8 U1.44@1802.04,1371.8
L39_1_N: JP2_B.66 U1.23 | length 456
  Top Layer w6: U1.23@2119.13,1371.8 2132.49,1371.8 2237,1476.32 2237,1623 2329,1715 JP2_B.66@2329,1733
L39_1_P: JP2_B.64 U1.24 | length 429.6
  Top Layer w6: U1.24@2119.13,1391.49 2132.49,1391.49 2225,1484 2225,1627.97 2308,1710.97 JP2_B.64@2308,1735
L40_1_N: JP2_B.40 U1.35 | length 315.4
  Top Layer w6: JP2_B.40@1924.5,1756 1924.5,1730.5 1902.49,1708.49 1902.49,1539.49 1927.58,1514.39 1927.58,1478.74 1931.42,1474.9 U1.35@1931.43,1461.72
L40_1_P: JP2_B.38 U1.36 | length 307.3
  Top Layer w6: JP2_B.38@1893,1756 1890.49,1753.48 1890.49,1713.46 1890.49,1534.51 1894,1531 1915.58,1509.42 1915.58,1478.74 1911.74,1474.9 U1.36@1911.74,1461.72
L41N_GCLK8_1: C121.2 JP2_B.61 R67.1 | length 1417.3
  Top Layer w8: JP2_B.61@2271,1999 v1(2271,2090)
  Top Layer w9: R67.1@3330,2450 3330,2375 C121.2@3335,2370 3335,2345 v1(3340,2340)
  Bottom Layer w8: v1(2271,2090) 2271,2101 2520,2350 2900,2350 2940,2310 3310,2310 v1(3340,2340)
L41P_GCLK9_1: C119.2 JP2_B.59 R66.1 | length 1287.9
  Top Layer w8: JP2_B.59@2239.5,1999 2239.5,2059.5 v1(2240,2060)
  Top Layer w9: R66.1@3170,2450 3170,2375 C119.2@3175,2370 3175,2345 v1(3180,2340)
  Bottom Layer w8: v1(2240,2060) 2240,2100 2510,2370 2910,2370 2950,2330 3170,2330 v1(3180,2340)
L42N_GCLK6_1: JP2_B.58
L42P_GCLK7_1: J11.1 JP2_B.54 | length 2227.6
  Top Layer w8: JP2_B.54@2145,1756 2145,1710 v1@2152,1703
  Bottom Layer w8: v1(2152,1705) 3537,320 v1(3750,320)
L43N_GCLK4_1: JP2_B.79 R59.2 | length 862.5
  Top Layer w8: JP2_B.79@2554.5,1999 v1(2554.5,2060)
  Bottom Layer w8: v1(2554.5,2060) 2690,2060 3115,1635 R59.2@3115,1570
L43P_GCLK5_1: JP2_B.77 R58.2 | length 736.8
  Top Layer w8: JP2_B.77@2523,1999 v1(2523,2090)
  Bottom Layer w8: v1(2523,2090) 2690,2090 2770,2010 3065,2010 R58.2@3115,1960
L44_1_N: JP2_B.62 U1.25 | length 392.6
  Top Layer w6: U1.25@2119.13,1411.17 2132.49,1411.17 2139,1417.69 2139,1460 2162,1483 2162,1623 JP2_B.62@2271.72,1732.72
L44_1_P: JP2_B.60 U1.26 | length 375.4
  Top Layer w6: U1.26@2119.13,1430.86 2119.13,1438.9 2127,1446.77 2127,1464.97 2150,1487.97 2150,1627.97 2240.51,1718.49 JP2_B.60@2240.51,1756.02
L45_1_N: J14.1 JP2_B.57 | length 2230.5
  Top Layer w8: JP2_B.57@2208,1999 v1(2208,2090)
  Bottom Layer w8: v1(2208,2090) 2208,2098 2540,2430 2910,2430 3060,2580 3060,2800 3470,3210 v1(3750,3210)
L45_1_P: J15.1 JP2_B.53 | length 3088.4
  Top Layer w8: JP2_B.53@2145,1999 2145,2065 2280,2200 v1(2280,2210)
  Bottom Layer w8: v1(2280,2210) 2290,2210 2530,2450 2900,2450 3040,2590 3040,3490 v1(3750,4200)
L46_1_N: J16.1 JP2_B.51 | length 4099
  Top Layer w8: JP2_B.51@2113.5,1999 2113.5,2063.5 2250,2200 v1(2250,2240)
  Bottom Layer w8: v1(2250,2240) 2290,2240 2520,2470 2890,2470 3020,2600 3020,4450 v1(3750,5180)
L47_1_N: JP2_B.52 U1.27 | length 305.5
  Top Layer w6: U1.27@2088.53,1461.45 2088.53,1474.9 2105,1491.36 2105,1714.67 2114.22,1723.9 JP2_B.52@2114.22,1756.31
L47_1_P: JP2_B.50 U1.28 | length 309.1
  Top Layer w6: U1.28@2068.85,1461.45 2068.85,1474.9 2093,1499.05 2093,1713.62 2082.72,1723.9 JP2_B.50@2082.72,1756.31
L49_0_N: JP3_B.29 U12.10 | length 535.8
  Top Layer w6: JP3_B.29@1768.67,3572.33 JP3_B.29@1767,3574 1767,3604.08 1722,3649.08 1722,3917 1817,4012 1854.04,4012 U12.10@1854.33,4011.71
L49_0_P: JP3_B.27 U12.9 | length 548.2
  Top Layer w6: JP3_B.27@1735.5,3574 1735.5,3608.9 1710,3634.4 1710,3921.97 1815.03,4027 1835,4027 1839.39,4031.39 U12.9@1854.33,4031.39
L49_1_N: JP2_B.48 U1.29 | length 294
  Top Layer w6: U1.29@2050,1462.18 2050,1755.5 JP2_B.48@2050.5,1756
L49_1_P: JP2_B.46 U1.30 | length 305.5
  Top Layer w6: JP2_B.46@2019.72,1756.31 2019.72,1723.9 2038,1705.62 2038,1489.97 2029.85,1481.82 U1.30@2029.85,1461.72
L50_0_N: JP3_B.70 U12.40 | length 814.2
  Top Layer w6: U12.40@2251.06,3913.28 2307.72,3913.28 v3(2330,3891) ; v3@2390.5,3276.5 2390.5,3277.5 ; JP3_B.70@2397.77,3331.15 2397.77,3302.27 2390.5,3295 2390.5,3277.5 ; v3@2402,3266 2390.5,3277.5
  Bottom Layer w6: v3(2330,3891) 2362,3859 2362,3416.97 2388,3390.97 2388,3278.5 v3(2399,3267.5)
L50_0_P: JP3_B.68 U12.39 | length 784.9
  Top Layer w6: U12.39@2251.06,3893.6 2270.49,3893.6 2274.33,3897.44 2294,3897.44 v3@2297,3897.44 ; JP3_B.68@2366.27,3331.15 2366.27,3331 2366.27,3307.23 2378.5,3295 2378.5,3277.5 v3@2367,3266
  Bottom Layer w6: v3(2294,3891) 2350,3835 2350,3412 2376,3386 2376,3279.5 v3(2364,3267.5)
L51_0_N: JP3_B.69 U12.42 | length 497
  Top Layer w6: U12.42@2251.06,3952.66 2349.31,3952.66 2398,3903.97 2398,3606.13 2397.77,3605.9 JP3_B.69@2397.77,3574.15
L51_0_P: JP3_B.67 U12.41 | length 482.9
  Top Layer w6: U12.41@2251.09,3933 2279,3933 2280,3934 2351,3934 2386,3899 2386,3625.63 2366.27,3605.9 JP3_B.67@2366.27,3574.15
L51_1_N: JP2_B.44 U1.31 | length 304.4
  Top Layer w6: JP2_B.44@1987.5,1756 1987.5,1711.47 2011,1687.97 2011,1475.67 2010.16,1474.84 U1.31@2010.16,1461.72
L51_1_P: JP2_B.42 U1.32 | length 315.6
  Top Layer w6: JP2_B.42@1956,1756 1956,1726 1999,1683 1999,1483.36 1990.48,1474.84 U1.32@1990.48,1461.72
L52_1_N: JP2_B.39
L58_1_N: JP2_B.34 U1.37 | length 329
  Top Layer w6: JP2_B.34@1830.72,1756.31 1830.72,1723.9 1820,1713.17 1820,1567.81 1887.84,1499.97 1887.84,1478.74 1891.68,1474.9 U1.37@1891.68,1461.45
L58_1_P: JP2_B.32 U1.38 | length 328.2
  Top Layer w6: JP2_B.32@1799.22,1756.31 1799.22,1723.9 1808,1715.12 1808,1562.84 1875.84,1495 1875.84,1478.74 1872,1474.9 U1.38@1872,1461.45
L60_1_N: JP3_B.17
L60_1_P: JP3_B.15
L60A_1_N: C38.2 R30.1 U12.4 | length 512.8
  Top Layer w9: R30.1@1601,3905 R30.1@1587,3905 ; C38.2@1661,3821 1661,3831 R30.1@1587,3905 ; U12.4@1854.33,4129.82 1772.82,4129.82 1672.41,4029.41 1586,3943 1586,3906 R30.1@1587,3905
L60A_1_P: C37.2 R29.1 U12.3 | length 534.3
  Top Layer w9: C37.2@1563,3821 1563,3863 R29.1@1523,3903 1523,3906.87 1765.63,4149.5 U12.3@1854.33,4149.5
L61_1_N: JP3_B.43
L61_1_P: JP3_B.41
L62_0_N: JP3_B.48 U12.26 | length 664.8
  Top Layer w6: U12.26@2025.67,3820.69 2025.67,3801.9 2021.83,3798.06 2021.83,3772.28 v3@2032.11,3762 ; v3@2050.77,3250 2051.5,3250.73 JP3_B.48@2051.5,3330.92
  Bottom Layer w6: v3(2032.11,3759) 2032.11,3741.11 2042.11,3731.11 2042.11,3712.89 2039.27,3710.05 2039.27,3261.5 v3@2050.77,3250
  other v3: 2052.77,3251
L62_0_P: JP3_B.46 U12.25 | length 700.9
  Top Layer w6: U12.25@2005.98,3820.69 2005.98,3801.9 2009.83,3798.06 2009.83,3732.28 v3(2020.11,3722) ; JP3_B.46@2020,3330.92 2020,3232.77 v3@2020.77,3232
  Bottom Layer w6: v3@2019.06,3714.49 v3@2020.11,3715.54 ; v3(2020.11,3722) v3@2020.11,3715.54 ; v3@2020.77,3232 2027.27,3238.5 2027.27,3708.38 v3@2020.11,3715.54
  other v3: 2023.77,3234
L63_0_N: JP3_B.74 U12.44 | length 946.1
  Top Layer w6: U12.44@2251.06,3992.02 2275.54,3992.02 2282.89,3999.38 2301.11,3999.38 ; 2301.17,3999.38 2323,3999.38 v3(2327,3995.38) ; JP3_B.74@2460.77,3331.15 2460.77,3302.27 2453.5,3295 2453.5,3276.5 2462.5,3267.5 v3@2468,3267.5
  Bottom Layer w6: v3(2327,3995.38) 2329.17,3993.2 2329.17,3957.17 2418.67,3867.67 2422.19,3864.16 2422.19,3454.78 2456,3420.97 2456,3275 2465.11,3265.89 v3(2468,3265.89)
L63_0_P: JP3_B.72 U12.43 | length 898.1
  Top Layer w6: U12.43@2251.06,3972.34 2286.96,3972.34 v3(2292,3977.38) ; JP3_B.72@2429.27,3331.15 2429.27,3307.23 2441.5,3295 2441.5,3277.5 v3@2430,3266
  Bottom Layer w6: v3(2292,3977.38) 2410.19,3859.19 2410.19,3449.81 2444,3416 2444,3275 2434.89,3265.89 v3(2433,3265.89)
L64_0_N: JP3_B.73 U12.46 | length 603
  Top Layer w6: U12.46@2251.06,4031.39 2273.82,4031.39 2275.22,4030 2352.97,4030 2451.02,3931.95 2451.02,3615.65 2460.77,3605.9 JP3_B.73@2460.77,3574.15
L64_0_P: JP3_B.71 U12.45 | length 585.7
  Top Layer w6: U12.45@2251.06,4011.71 2251.33,4011.44 2251.77,4011 2274.71,4011 2278.79,4015.08 2281.71,4018 2348,4018 2439.02,3926.98 2439.02,3615.65 2429.27,3605.9 JP3_B.71@2429.27,3574.15
L65_0_N: C7.2 JP3_B.75 | length 2663.7
  Top Layer w14: C7.2@2440.46,1266.46 2440.46,1358.51 cw(c2506.49,1358.51) 2459.8,1405.2 2662.51,1607.91 ccw(c2572,1698.42) 2700,1698.42 2700,1868.98 cw(c2800,1868.98) 2729.29,1939.69 2785.51,1995.91 ccw(c2695,2086.42) 2823,2086.42 2823,3288.58 ccw(c2695,3288.58) 2785.51,3379.09 2735.69,3428.91 ccw(c2645.18,3338.4) 2645.18,3466.4 2565.02,3466.4 cw(c2565.01,3539.91) 2491.5,3539.9 JP3_B.75@2491.5,3574
L65_0_P: C5.2 JP3_B.76 | length 2619.5
  Top Layer w14: C5.2@2333.46,1301.46 cw(c2374.5,1301.46) 2345.48,1330.48 2642.71,1627.71 ccw(c2572,1698.42) 2672,1698.42 2672,1868.98 cw(c2800,1868.98) 2709.49,1959.49 2765.71,2015.71 ccw(c2695,2086.42) 2795,2086.42 2795,3288.58 ccw(c2695,3288.58) 2765.71,3359.29 2715.89,3409.11 ccw(c2645.18,3338.4) 2645.18,3438.4 2565.02,3438.4 ccw(c2565.01,3364.89) 2491.5,3364.9 JP3_B.76@2491.5,3331
L66_0_N: JP3_B.33 U12.12 | length 491.2
  Top Layer w6: JP3_B.33@1830.77,3574.15 1830.77,3605.9 1755,3681.67 1755,3907 1821,3973 1852.47,3973 U12.12@1854,3971.47
L66_0_P: JP3_B.31 U12.11 | length 504.8
  Top Layer w6: JP3_B.31@1798.5,3574 1798.5,3618.5 1743,3674 1743,3911.97 1794.51,3963.49 1820.03,3989 1851.85,3989 U12.11@1854,3991.15
L70_1_N: JP3_B.21
L70_1_P: JP3_B.19
L\D\A\C\: JP3_B.28 U10.8 | length 1822.1
  Top Layer w6: U10.8@860.84,4125.69 862,4124.54 862,4045.6 750,3933.6 750,3651.21 1255.21,3146 1597,3146 1740.5,3289.5 JP3_B.28@1740.5,3331
NetC3_1: C3.1 U1.1 U3.2 | length 700.1
  Top Layer w9: v3(1596,782.56) 1530,782.56 1530,940 1640,1050 1715,1050 1767,1102 1767,1134 1780,1147 1795.9,1147 1832.63,1183.73 U1.1@1832.63,1179.63 ; C3.1@1758.26,1148.83 C3.1@1762.43,1153
  Bottom Layer w12: v3@1596,788 1598.44,785.56 U3.2@1639.29,785.56
NetC5_1: C5.1 U1.17 | length 108.3
  Top Layer w10: U1.17@2119.13,1253.69 2148.88,1253.69 cw(c2148.88,1153.69) C5.1@2219.6,1224.4
NetC6_5: C6.5 U1.9 | length 51.7
  Top Layer w10: C6.5@1989.37,1132.18 ccw(c1987.58,1133.97) 1990.11,1133.97 U1.9@1990.11,1183.73
NetC6_8: C6.8 U1.6 | length 51.7
  Top Layer w10: C6.8@1930.32,1132.18 ccw(c1928.53,1133.97) 1931.05,1133.97 U1.6@1931.05,1183.73
NetC7_1: C7.1 U1.18 | length 278
  Top Layer w10: U1.18@2119.13,1273.38 2230.2,1273.38 cw(c2230.2,1173.38) 2300.91,1244.09 2324.49,1220.51 cw(c2274.99,1171) C7.1@2345,1171
NetC11_1: C11.1 U1.14 U5.2 | length 1014.1
  Top Layer w9: v3(2065.24,782.56) 2065.24,734.76 2095,705 2330,705 2360,735 2360,958.21 2265.21,1053 2191,1053 2134,1110 2134,1138.27 2088.59,1183.68 U1.14@2088.53,1183.73
  Bottom Layer w14: v3@2068.24,785.56 U5.2@2110.38,785.56
NetC12_1: C12.1 U1.48 | length 113.1
  Top Layer w7: C12.1@1701,1314 1726,1289 1786,1289 1790.06,1293.06 U1.48@1802.04,1293.06
NetC15_1: C15.1 R21.2 U9.3 | length 159.5
  Top Layer w9: U9.3@1088.05,4516.7 1146.63,4516.7 R21.2@1163.02,4500.31 1180,4517.28 v1(1180,4530)
  Bottom Layer w9: v1(1180,4530) 1182.79,4527.21 C15.1@1219.87,4527.21
NetC17_2: C17.2 R21.1 U7.6 | length 258
  Top Layer w9: U7.6@1202,4382 1265,4382 1265,4500.31 ; R21.1@1224.26,4500.31 R21.1@1228.02,4500.31 1265,4500.31 ; C17.2@1301,4500.31 1265,4500.31
NetC24_2: C24.2 JP5.1 R23.2 | length 329
  Top Layer w15: R23.2@1126,4640 1171,4640 1240,4640 C24.2@1240,4635 ; C24.2@1241,4640 JP5.1@1241,4850
NetC25_1: C25.1 R23.1 U8.1 U10.20 U11.1 | length 1790.4
  Top Layer w9: U10.20@1039.98,3873.72 1039.98,3898.41 C25.1@1096.12,3954.55 1160,4018.43 v1(1160,4215) 1088.05,4215 U8.1@1088.05,4216.94
  Top Layer w15: U11.1@464.51,4417.1 642.9,4417.1 ; v1(750,4200) 642.9,4307.1 642.9,4417.1 ; R23.1@991,4650 875.8,4650 642.9,4417.1
  Bottom Layer w15: v1(750,4200) 794,4200 824,4170 1115,4170 v1(1160,4215)
NetC25_2: C25.2 U8.2 U10.1 | length 294.3
  Top Layer w9: U8.2@1088.05,4242.54 1039.98,4242.54 U10.1@1039.98,4125.69 1039.98,4075.69 C25.2@1096.12,4019.55
NetC29_2: C29.2 JP6.1 R26.2 | length 335
  Top Layer w20: R26.2@376,4640 376,4635 421,4635 491,4635 JP6.1@491,4850
NetC35_1: C35.1 C36.1 R27.1 R28.2 R29.2 R30.2 | length 547.3
  Top Layer w9: C35.1@1387.74,3776.03 R27.1@1387.74,3962.97 ; R28.2@1389.74,3903 R29.2@1458,3903 1450,3895 v3(1450,3872) ; R30.2@1666,3905 1666,3881.83 v2(1673.26,3874.57)
  Bottom Layer w9: v3(1450,3872) 1670.69,3872 v2(1673.26,3874.57)
NetC39_1: C39.1 U12.55 | length 107.3
  Top Layer w9: U12.55@2222.52,4222.42 2298.35,4222.42 C39.1@2320.61,4244.69
NetC40_1: C40.1 JP7.1 R33.2 | length 664
  Top Layer w15: R33.2@2490,4425 C40.1@2537,4378 ; R33.2@2492.96,4423.96 2613,4544 ; 2641.71,4572.71 2613,4544 ; JP7.1@2742,4882 2742,4714.42 cw(c2642,4714.42) 2741,4700.32 cw(c2642,4714.42) 2712.71,4643.71 2613,4544
NetC43_1: C43.1 JP8.1 R37.2 | length 704.2
  Top Layer w15: C43.1@1580,4351 C43.1@1580,4355.58 ; C43.1@1581,4351 ccw(c1581,4355.83) C43.1@1584.41,4352.41 ; C43.1@1587.41,4349.41 1928,4690 1962.71,4724.71 ccw(c1892,4795.42) 1980.73,4749.3 ccw(c1892,4795.42) 1991,4781.31 ccw(c1892,4795.42) 1992,4795.42 JP8.1@1992,4882
NetC46_1: C46.1 C106.2 U1.50 U6.4 | length 311.3
  Top Layer w10: U6.4@1631.4,1209.61 1710.39,1209.61 ; C46.1@1653,1267 1710.39,1209.61 ; C106.2@1719.45,1185.86 1719.45,1199.45 1729.61,1209.61 ; C106.2@1719.45,1200.55 1710.39,1209.61 ; U1.50@1802.41,1253.96 1773.96,1253.96 1729.61,1209.61 ; 1710.39,1209.61 1729.61,1209.61
NetC48_1: C48.1 L1.2 L2.1 | length 250.4
  Bottom Layer w12: L2.1@658,1469 688,1439 C48.1@688,1388
  Bottom Layer w30: L1.2@501,1469 L2.1@658,1469
NetC49_1: C49.1 L2.2 U17.6 U17.7 U17.8 | length 456.1
  Bottom Layer w10: 726,1699 773,1699 798,1724
  Bottom Layer w12: L2.2@658,1604 L2.2@701,1604 ; L2.2@702,1604 702,1552.8 U17.6@773,1552.8
  Bottom Layer w20: C49.1@618,1724 618,1644 L2.2@658,1604
  Bottom Layer w30: L2.2@701,1604 702,1604 U17.8@773,1604
  other v2: 780,1605 830,1605 880,1605 695,1655 745,1655 795,1655 845,1655 895,1655 945,1655 995,1655 695,1705 745,1705 795,1705 845,1705 895,1705 945,1705 995,1705 695,1755 745,1755 795,1755 845,1755 895,1755 945,1755 995,1755 695,1805 745,1805 795,1805 845,1805 895,1805 945,1805 995,1805
NetC51_1: C51.1 L3.2 L4.1 | length 185.6
  Bottom Layer w12: L3.2@2127,2883.2 2128,2882.2 L4.1@2220,2882.2 2220,2811.2 C51.1@2235,2796.2
NetC52_1: C52.1 L4.2 U15.6 U15.7 U15.8 | length 379.9
  Bottom Layer w12: L4.2@2218,2972.2 2218,2967.8 U15.6@2305,2967.8 ; C52.1@2258,3137.2 2237,3116.2 2237,3019 ; U15.7@2305,2993.4 2237,2993.4 2237,3019 ; U15.8@2305,3019 2237,3019
NetC54_2: C54.2 R22.1 R40.2 U15.5 | length 238.9
  Bottom Layer w9: 2303,2890.4 2328,2865.4 2328,2805.4 R40.2@2328,2745.4 ; U15.5@2305,2940.4 2305,2892.2 C54.2@2330,2867.2
NetC55_1: C55.1 L5.2 L6.1 | length 182.9
  Bottom Layer w12: L5.2@1413,2883.2 1414,2882.2 1450,2882.2 ; C55.1@1456,2795.2 1456,2876.2 1450,2882.2 ; L6.1@1506,2882.2 1450,2882.2
NetC56_1: C56.1 L6.2 U16.6 U16.7 U16.8 | length 379.9
  Bottom Layer w12: L6.2@1506,2972.2 1506,2967.8 U16.6@1593,2967.8 ; C56.1@1546,3137.2 1525,3116.2 1525,3019 ; U16.7@1593,2993.4 1525,2993.4 1525,3019 ; U16.8@1593,3019 1525,3019
NetC58_1: C58.1 L7.2 L8.1 | length 248
  Bottom Layer w20: L7.2@984,719 L8.1@1106,719 ; C58.1@1106,626 L8.1@1106,719 ; L8.1@1139,719 L8.1@1106,719
NetC60_1: C60.1 L9.2 L10.1 | length 215
  Bottom Layer w20: L9.2@326,318 448,318 C60.1@448,225
NetC62_2: C62.2 R41.1 R42.2 U16.5 | length 203.6
  Bottom Layer w9: U16.5@1591,2940.4 1591,2892.2 C62.2@1616,2867.2 R41.1@1616,2807.2 R42.2@1616,2747.2
NetC64_1: C64.1 L11.2 L12.1 | length 215
  Bottom Layer w20: L11.2@897,319 1019,319 C64.1@1019,226
NetC65_1: C65.1 L13.2 L14.1 | length 190
  Bottom Layer w20: C65.1@730,3045 815,3045 ; L13.2@820,2990 L14.1@820,3095
NetC67_2: C67.2 R43.1 R44.2 U17.5 | length 228.2
  Bottom Layer w12: U17.5@773,1527.2 798,1527.2 C67.2@798,1454 R43.1@798,1389 R44.2@798,1324
NetC68_1: C68.1 L15.2 L16.1 | length 219
  Bottom Layer w20: L15.2@985,1155 L15.2@985,1169 ; C68.1@1111,1076 L16.1@1111,1155
  Bottom Layer w30: L15.2@985,1155 L16.1@1111,1155
NetC70_1: C70.1 L17.2 L18.1 | length 195
  Bottom Layer w20: L17.2@1170,2800 L18.1@1170,2905 ; 1170,2855 C70.1@1260,2855
NetC72_2: C72.2 R45.1 R46.2 U18.5 | length 214.1
  Bottom Layer w9: U18.5@1595,2365.4 1595,2315.2 C72.2@1619,2291.2
  Bottom Layer w12: R46.2@1619,2161.2 R45.1@1619,2226.2 C72.2@1619,2291.2
NetC73_1: C73.1 L19.2 L20.1 | length 207
  Bottom Layer w20: L19.2@1301,2325.2 L20.1@1404,2325.2 1419,2325.2 C73.1@1419,2236.2
NetC74_1: C74.1 L20.2 U18.6 U18.7 U18.8 | length 350
  Bottom Layer w12: C74.1@1510,2416.4 U18.7@1593,2416.4 ; C74.1@1510,2442 U18.8@1593,2442 ; C74.1@1515,2390.8 U18.6@1593,2390.8
  Bottom Layer w20: L20.2@1404,2415.2 C74.1@1510,2415.2
  other v2: 1600,2443 1650,2443 1700,2443 1515,2493 1565,2493 1615,2493 1665,2493 1715,2493 1765,2493 1515,2543 1565,2543 1615,2543 1665,2543 1715,2543 1765,2543
NetC83_1: C83.1 L21.2 L22.1 | length 201.6
  Bottom Layer w12: L22.1@2111,2290 L22.1@2130,2314
  Bottom Layer w20: L22.1@2130,2314 C83.1@2130,2485
NetC95_1: C95.1 L25.2 L26.1 | length 215
  Bottom Layer w20: L25.2@97,2396.9 219,2396.9 C95.1@219,2303.9
NetC99_1: C99.1 L23.2 L24.1 | length 196.2
  Bottom Layer w14: L23.2@116,2885 L24.1@219,2885 234,2870 C99.1@234,2798
NetC100_1: C100.1 L24.2 U20.6 U20.7 U20.8 | length 411.9
  Bottom Layer w14: C100.1@259,3139 263,3135 263,3019 ; U20.6@304,2967.8 219,2967.8 L24.2@219,2975 235,2975 L24.2@235,2993.4 ; U20.7@304,2993.4 L24.2@235,2993.4 ; U20.8@304,3019 263,3019 ; L24.2@235,2993.4 235,3019 263,3019
NetC102_2: C102.2 R48.1 R49.2 U20.5 | length 198.2
  Bottom Layer w14: R49.2@309,2739 R48.1@309,2804 C102.2@309,2869 U20.5@309,2937.2
NetC105_1: C105.1 L27.2 L28.1 | length 215
  Bottom Layer w20: L27.2@597,2400.51 719,2400.51 C105.1@719,2307.51